# Altium PCB EN_AS5048.PcbDoc
Units mm, origin at the board's own origin, x right, y up, seen from the top; angles counter-clockwise.
Board outline 30 x 30 mm, 2 copper layers (Top Layer, Bottom Layer); 7 components, 6 nets, 34 pads, 2 vias.
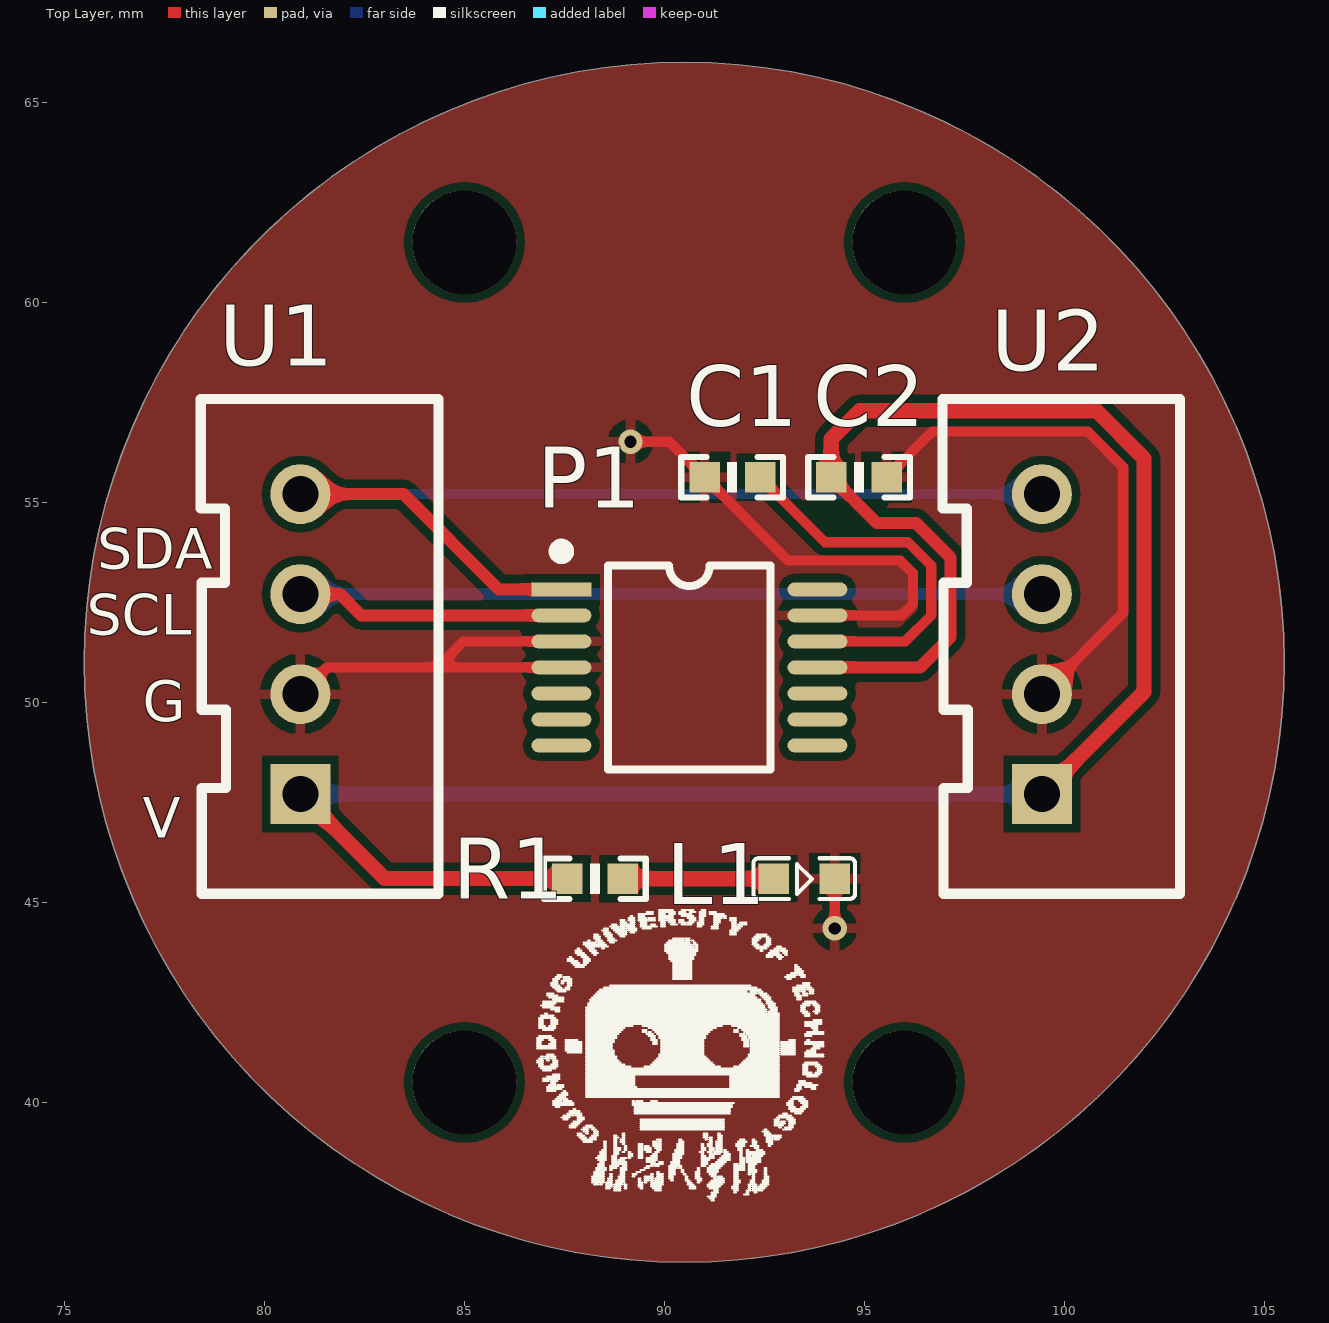
[diagram p0: Top Layer view]
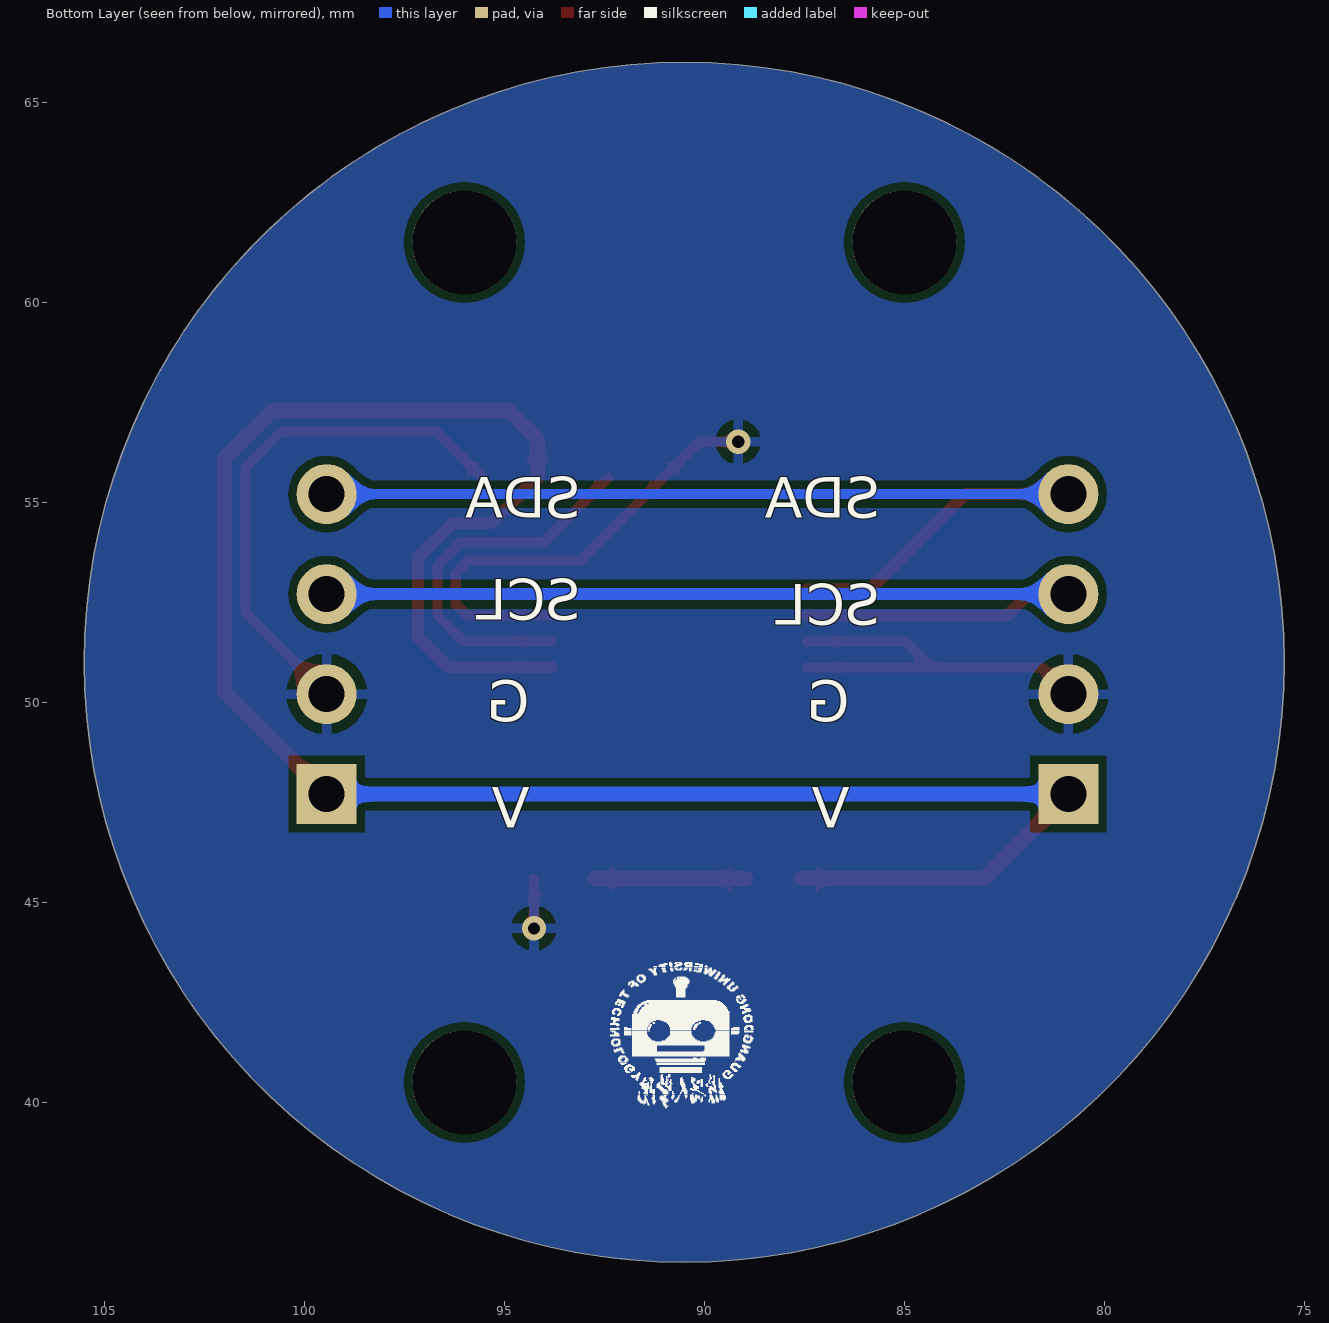
[diagram p1: Bottom Layer view, seen from below]
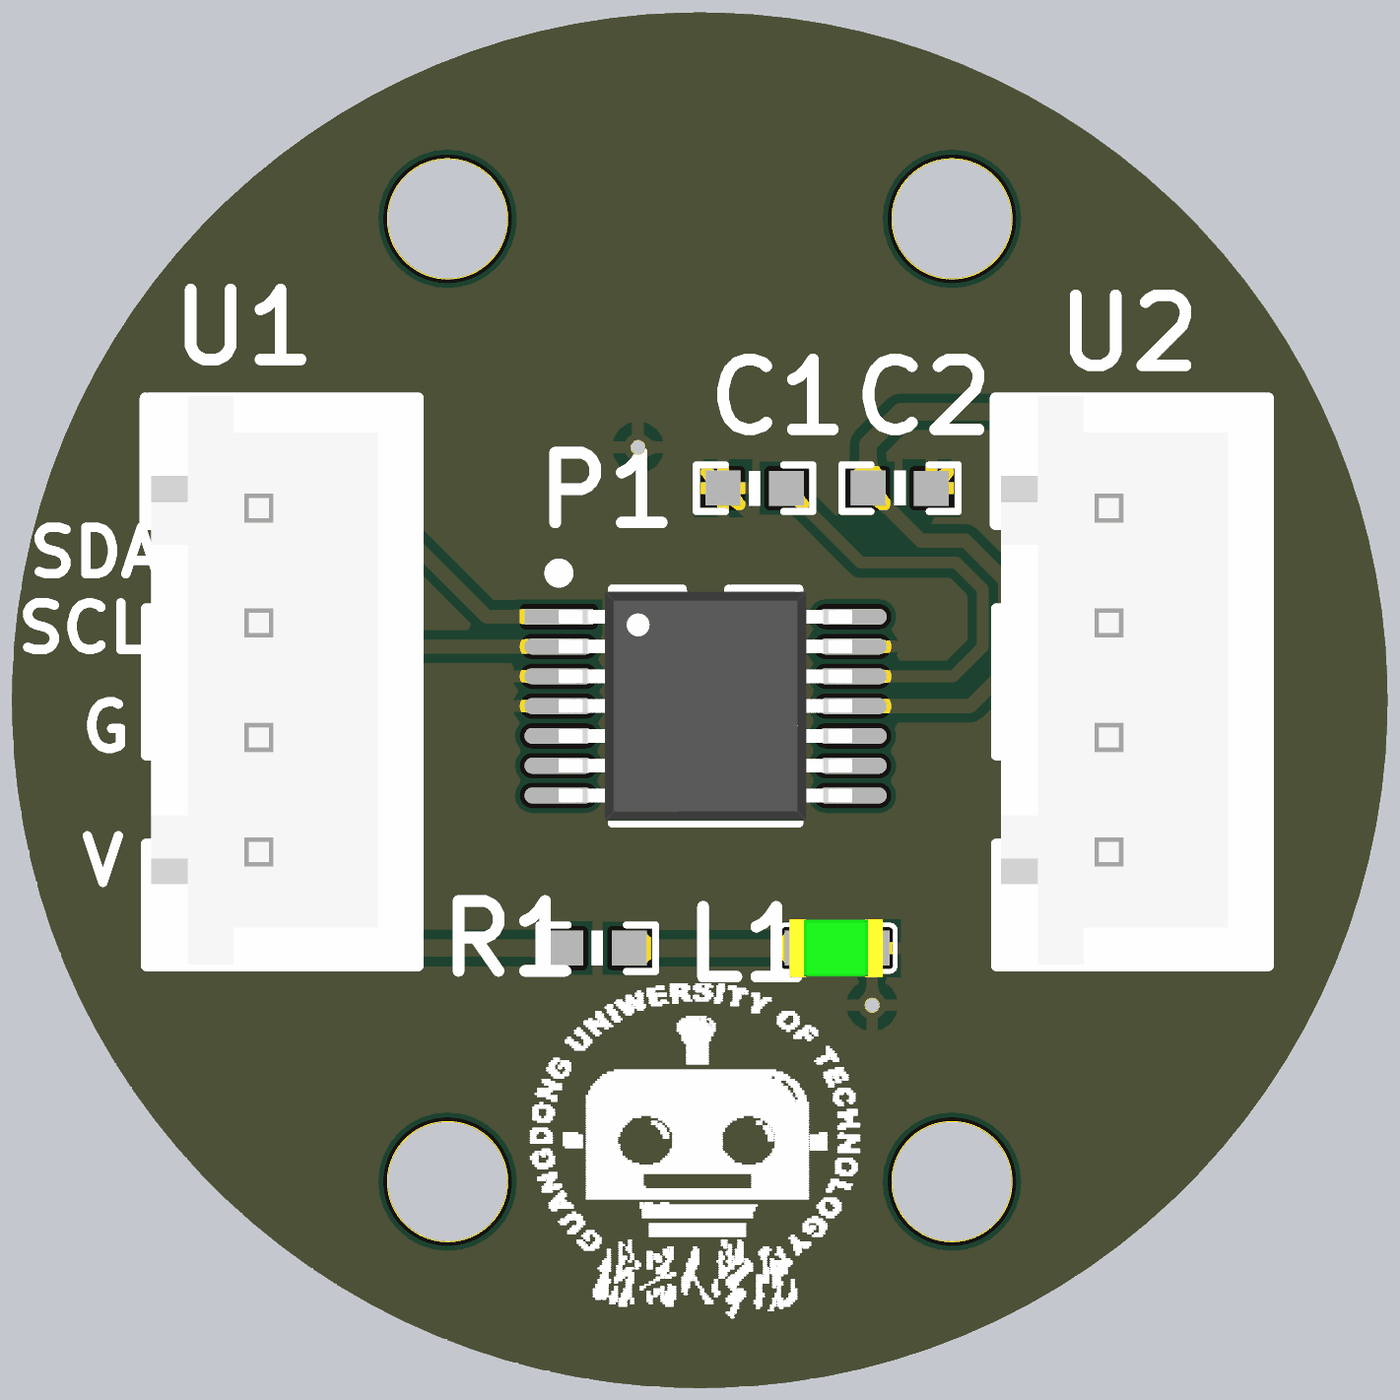
[diagram p2: 3D render of the assembled board from above, using the file's embedded part models]

## Layer stack, top to bottom
Top Solder: solder mask 0.0102, Solder Resist, Dk 3.5
Top Layer: signal copper 0.0356
Dielectric 1: dielectric 0.32, FR-4, Dk 4.8
Bottom Layer: signal copper 0.0356
Bottom Solder: solder mask 0.0102, Solder Resist, Dk 3.5

## Board outline
75.5,51 ccw(c90.5,51) 90.5,36 ccw(c90.5,51) 105.5,51 ccw(c90.5,51) 90.5,66 ccw(c90.5,51)

## Design rules (kind name [scope] priority, off if disabled: settings)
Clearance [All] p1: gap=0.203 ignorepadtopadclearanceinfootprint=FALSE
PolygonConnect [All] p1: connectstyle=Relief reliefconductorwidth=0.254 reliefentries=4 polygonreliefangle="90 Angle" airgapwidth=0.254
RoutingVias [All] p1: holewidth=0.711 width=1.27 viastyle="Through Hole" minholewidth=0.711 minwidth=1.27 maxholewidth=0.711 maxwidth=1.27
SolderMaskExpansion [All] p1: expansion=0.102
Width [All] p1: maxlimit=0.508 minlimit=0.203 preferedwidth=0.254
30 further rules are at their usual default settings.

## Components (designator, comment, footprint, x,y, rotation, side; value= is the part's Value field where it differs from the comment)
C1 "10uF" 0603P 91.694,55.626 r0 top
C2 "100nF" 0603P 94.869,55.624 r180 top
L1 "LED1" 0603_LED 93.472,45.593 r0 top
P1 "AS5047P" TSSOP-14 90.5,51 r0 top locked
R1 "1K" 0603P 88.265,45.593 r0 top
U1 "IIC" XH2.54-4 80.899,47.705 r90 top
U2 "IIC" XH2.54-4 99.441,47.705 r90 top

## Footprints (in the part's own frame and the unit in brackets; to place one, negate y for a bottom-side part, rotate by r counter-clockwise, add the part's x,y. Pads: shape width x height; smd on the part's side, far side on the other; paste and mask are expansions set on the pad)
0603_LED [mil]
  rect 30x30 smd: 1(-29,0) 2(31,0)
  silkscreen extent -49,-20 51,20, body extent -40,-25 40,25, height 43
0603P [mil]
  rect 30x30 smd: 1(-27,0) 2(27.5,-0.06)
  silkscreen extent -50,-20 50,20
TSSOP-14 [mm]
  rect 1.5x0.35 smd: 1(-3.073,1.823)
  oval 1.5x0.35 smd: 2(-3.073,1.173) 3(-3.073,0.523) 4(-3.073,-0.127) 5(-3.073,-0.777) 6(-3.073,-1.427) 7(-3.073,-2.077) 8(3.327,-2.077) 9(3.327,-1.427) 10(3.327,-0.777) 11(3.327,-0.127) 12(3.327,0.523) 13(3.327,1.173) 14(3.327,1.823)
  silkscreen extent -3.2,-2.68 2.16,2.9, body extent -3.08,-2.63 3.33,2.37, height 1.25
XH2.54-4 [mm]
  rect 1.5x1.5 hole 0.9: 1(0,0)
  round 1.5 hole 0.9: 2(2.5,0) 3(5,0) 4(7.5,0)
  silkscreen extent -2.49,-3.45 9.88,2.49, body extent -2.47,-3.38 9.93,2.37, height 7

## Part data
C1 C2: library part C
L1: library part LED2, "Typical RED, GREEN, YELLOW, AMBER GaAs LED", PackageDocument=Feb-2002, LatestRevisionDate=17-Jul-2002, LatestRevisionNote="Re-released for DXP Platform.", PackageReference=3.2X1.6X1.1, Published=8-Jun-2000, Publisher="Altium Limited"
P1: library part AS5048B-TSSOP14_1
R1: library part R
U1 U2: library part XH2.54插座-4P

## Free pads (board coordinates)
  round 2.6 hole 2.6: 0(85,40.5) 0(85,61.5) 0(96,40.5) 0(96,61.5)

## Via types
v1: diameter 0.61, hole 0.305, Top Layer to Bottom Layer, tented both sides, 2 vias

## Nets (pads, with @x,y where several pads share a name; then routed paths per layer and width w, separated by ;. In a path a pad name is that pad's centre, name@x,y a point inside that pad or via, vN(x,y) a via of type N, cw(c..) or ccw(c..) an arc to the next point about the centre after c; other vN are vias at no path point)
5V: C2.2 P1.11 R1.1 U1.1 U2.1 | length 54.6
  Top Layer w0.305: P1.11 96.393,50.873 97.155,51.635 97.155,53.619 96.291,54.483 95.313,54.483 C2.2
  Top Layer w0.381: U1.1 83.011,45.593 R1.1 ; C2.2 94.17,56.578 94.882,57.29 100.8,57.29 101.994,56.096 101.994,50.258 U2.1
  Bottom Layer w0.381: U1.1 U2.1
GND: C1.1 C2.1 L1.2 P1.3 P1.4 P1.13 U1.2 U2.2 | length 36.4
  Top Layer w0.254: U1.2 81.567,50.873 84.328,50.873 ; P1.4 84.328,50.873 ; P1.3 84.978,51.523 84.328,50.873 ; v1(89.154,56.515) 90.119,56.515 C1.1 93.091,53.543 95.902,53.543 96.215,53.23 96.215,52.451 95.937,52.173 P1.13 ; v1(94.259,44.348) L1.2 ; C2.1 96.699,56.769 100.584,56.769 101.473,55.88 101.473,52.237 U2.2
NetC1_2: C1.2 P1.12 | length 9.6
  Top Layer w0.254: C1.2 94.016,54 96.092,54 96.672,53.42 96.672,52.168 96.027,51.523 P1.12
NetL1_1: L1.1 R1.2 | length 3.8
  Top Layer w0.381: R1.2 92.734,45.591 L1.1
SCL: P1.2 U1.3 U2.3 | length 25.3
  Top Layer w0.305: U1.3 81.891,52.705 82.423,52.173 P1.2
  Bottom Layer w0.305: U1.3 U2.3
SDA: P1.1 U1.4 U2.4 | length 26.1
  Top Layer w0.305: U1.4 83.479,55.205 85.861,52.823 P1.1
  Bottom Layer w0.254: U1.4 U2.4
pads on no net: P1.5 P1.6 P1.7 P1.8 P1.9 P1.10 P1.14

## Polygon pours and split planes (outlines as drawn)
GND on Top Layer "Top Layer-No Net" (solid, remove dead copper, pour order 15): 75.5,51 ccw(c90.5,51) 90.5,36 ccw(c90.5,51) 105.5,51 ccw(c90.5,51) 90.5,66 ccw(c90.5,51)
GND on Bottom Layer "Top Layer-No Net1" (solid, remove dead copper, pour order 16): 75.5,51 ccw(c90.5,51) 90.5,36 ccw(c90.5,51) 105.5,51 ccw(c90.5,51) 90.5,66 ccw(c90.5,51)

## Silkscreen, mask and mechanical layers (free items; w line width, h text height)
Top Overlay:
  drawing of 873 lines, arcs and shapes, not listed
  text "SDA" at 75.819,53.34 h1.02
  text "SCL" at 75.565,51.689 h1.02
  text "G" at 76.962,49.53 h1.02
  text "V" at 76.962,46.609 h1.02
Bottom Overlay:
  drawing of 873 lines, arcs and shapes, not listed
  text "SDA" at 85.598,54.61 h1.02
  text "SDA" at 93.091,54.61 h1.02
  text "SCL" at 93.091,52.07 h1.02
  text "SCL" at 85.598,51.943 h1.02
  text "G" at 86.36,49.53 h1.02
  text "G" at 94.361,49.53 h1.02
  text "V" at 86.36,46.863 h1.02
  text "V" at 94.361,46.863 h1.02
Mechanical 1:
  circle w0.254: c90.5,51 r15